# EAGLE board fesz_boundary_value_meter (EAGLE 6.5.0)

Size 160 x 100 mm. Coordinates in mm from the lower left corner, seen from the top.
Outline: 0,0 160,0 160,100 0,100 0,0
Copper layers (1*16): Top 0.035mm / dielectric 1.5mm / Bottom 0.035mm
Design rules "default": minimum track width 10mil, minimum drill 24mil, track to track 8mil, track to pad 8mil, pad to pad 8mil, via to via 8mil, smd to smd 8mil, copper to edge 40mil, drill to drill 8mil, minimum pad ring 10mil, minimum via ring 8mil, stop-mask expansion 4mil, vias tented up to drill 0mil, thermal gap 10mil

## Footprints (pad centres in the part's own frame; a part is rotated, then mirrored left to right if it is on the bottom)
E2,5-6 = drill 0.813 pad 1.6: + -1.27,0 | drill 0.813 pad 1.6 octagon: - 1.27,0
E2,5-6E = drill 0.813 pad 1.575: + -1.27,0 | drill 0.813 pad 1.575 octagon: - 1.27,0
MA04-1 = drill 1.016 long: 1 -3.81,0; 2 -1.27,0; 3 1.27,0; 4 3.81,0
DO41-10 = drill 1.118: A 5.08,0; C -5.08,0
MA08-1 = drill 1.016 long: 1 -8.89,0; 2 -6.35,0; 3 -3.81,0; 4 -1.27,0; 5 1.27,0; 6 3.81,0; 7 6.35,0; 8 8.89,0
DIL28-3 = drill 0.813 long: 1 -16.51,-3.81; 2 -13.97,-3.81; 3 -11.43,-3.81; 4 -8.89,-3.81; 5 -6.35,-3.81; 6 -3.81,-3.81; 7 -1.27,-3.81; 8 1.27,-3.81; 9 3.81,-3.81; 10 6.35,-3.81; 11 8.89,-3.81; 12 11.43,-3.81; 13 13.97,-3.81; 14 16.51,-3.81; 15 16.51,3.81; 16 13.97,3.81; 17 11.43,3.81; 18 8.89,3.81; 19 6.35,3.81; 20 3.81,3.81; 21 1.27,3.81; 22 -1.27,3.81; 23 -3.81,3.81; 24 -6.35,3.81; 25 -8.89,3.81; 26 -11.43,3.81; 27 -13.97,3.81; 28 -16.51,3.81
DUOLED-C-5MM = drill 0.813 long: AR 2.54,0; AX -2.54,0; C 0,0
LED3MM = drill 0.813 octagon: A -1.27,0; K 1.27,0
W237-102 = drill 1.194 long: 1 -2.5,-1.27; 2 2.5,-1.27
0207/10 = drill 0.813 octagon: 1 -5.08,0; 2 5.08,0
02PA = drill 0.914 long: 1 -1.27,0; 2 1.27,0
TO92 = drill 0.813 octagon: 1 1.27,0; 2 0,1.905; 3 -1.27,0
TO220V = drill 1.016 long: 1 -2.54,-2.54; 2 0,-2.54; 3 2.54,-2.54
S64W = drill 0.813 long: A 2.54,1.27; E -2.54,1.27; S 0,1.27

## Placement (x,y rotation side)
C1  100+uF  [E2,5-6]  -22.86,35.56 0 top  (outside the outline)
C2  10uF  [E2,5-6E]  -33.02,35.56 0 top  (outside the outline)
CATHODES  [MA04-1]  -43.18,34.29 0 top  (outside the outline)
D1  1N4004  [DO41-10]  -52.07,27.94 0 top  (outside the outline)
DIGITS  [MA08-1]  -34.29,27.94 0 top  (outside the outline)
IC1  [DIL28-3]  -36.83,6.35 0 top  (outside the outline)
LD1  [DUOLED-C-5MM]  26.67,29.21 0 top
LD2  [DUOLED-C-5MM]  21.59,34.29 0 top
LED2  Yellow  [LED3MM]  -58.42,57.15 0 top  (outside the outline)
POWER  [W237-102]  -17.78,19.05 0 top  (outside the outline)
R1  330  [0207/10]  -57.15,40.64 0 top  (outside the outline)
R2  330  [0207/10]  -19.05,45.72 0 top  (outside the outline)
R3  330  [0207/10]  -31.75,45.72 0 top  (outside the outline)
R4  330  [0207/10]  -44.45,45.72 0 top  (outside the outline)
R5  330  [0207/10]  -57.15,45.72 0 top  (outside the outline)
R6  330  [0207/10]  -19.05,50.8 0 top  (outside the outline)
R7  330  [0207/10]  -31.75,50.8 0 top  (outside the outline)
R8  330  [0207/10]  -44.45,50.8 0 top  (outside the outline)
R9  1000  [0207/10]  -57.15,50.8 0 top  (outside the outline)
R10  330  [0207/10]  -19.05,55.88 0 top  (outside the outline)
R11  330  [0207/10]  -31.75,55.88 0 top  (outside the outline)
R12  330  [0207/10]  -44.45,55.88 0 top  (outside the outline)
SL1  [02PA]  -15.24,2.54 0 top  (outside the outline)
T1  BC337  [TO92]  -59.69,34.29 0 top  (outside the outline)
T2  BC337  [TO92]  -22.86,40.64 0 top  (outside the outline)
T3  BC337  [TO92]  -35.56,40.64 0 top  (outside the outline)
T4  BC337  [TO92]  -48.26,40.64 0 top  (outside the outline)
V_REG  7805TV  [TO220V]  -46.99,21.59 0 top  (outside the outline)
VOLTAGE_DIVIDER  10K  [S64W]  -35.56,17.78 0 top  (outside the outline)

## Library data of the parts
C1 C2 R1-R12 = rcl
CATHODES DIGITS = con-lstb; OC_FARNELL: unknown; OC_NEWARK: unknown
D1 = diode
IC1 = ic-package
LD1 LD2 LED2 = led
POWER = con-wago-500; MPN: 237-102; OC_FARNELL: unknown; OC_NEWARK: 70K9898
SL1 = con-amp-quick; OC_FARNELL: unknown; OC_NEWARK: unknown
T1-T4 = transistor-neu-to92
V_REG = linear
VOLTAGE_DIVIDER = pot

## Nets
DIGIT_1_1: IC1.18 R1.1
DIGIT_2_: DIGITS.8 R1.2
DIGIT_2_1: IC1.17 R2.1
DIGIT_2_2: DIGITS.7 R2.2
DIGIT_3_1: IC1.16 R3.1
DIGIT_4_1: IC1.15 R4.1
DIGIT_5_1: IC1.14 R5.1
DIGIT_7_1: IC1.12 R7.1
DIGIT_8_1: IC1.11 R8.1
GND: C1.- C2.- IC1.8 IC1.22 LD1.C LD2.C LED2.K POWER.1 SL1.1 T1.1 T2.1 T3.1 T4.1 V_REG.2 VOLTAGE_DIVIDER.E
N$1: IC1.27 T1.2
N$2: IC1.26 T2.2
N$3: IC1.25 T3.2
N$4: IC1.24 T4.2
N$5: CATHODES.4 T1.3
N$6: CATHODES.3 T2.3
N$7: DIGITS.3 R6.2
N$8: CATHODES.2 T3.3
N$9: CATHODES.1 T4.3
N$10: DIGITS.6 R3.2
N$11: DIGITS.5 R4.2
N$12: DIGITS.4 R5.2
N$13: DIGITS.1 R8.2
N$14: LD1.AR LD2.AR R10.1
N$15: IC1.28 VOLTAGE_DIVIDER.S
N$16: IC1.13 R6.1
N$17: DIGITS.2 R7.2
N$18: IC1.2 R9.2
N$19: IC1.3 R10.2
N$20: R9.1 SL1.2
N$21: LD2.AX R12.1
N$22: IC1.4 R11.2
N$23: IC1.5 R12.2
N$24: LD1.AX R11.1
V_IN_MEASURE: D1.A POWER.2 VOLTAGE_DIVIDER.A
V_IN_SUPPLY: C1.+ D1.C V_REG.1
VCC: C2.+ IC1.7 IC1.20 V_REG.3

## Tracks (layer width: path | path; a pad name or v marks a point on that pad's centre or on a via)
DIGIT_1_1  (1 unrouted)
DIGIT_2_  (1 unrouted)
DIGIT_2_1  (1 unrouted)
DIGIT_2_2  (1 unrouted)
DIGIT_3_1  (1 unrouted)
DIGIT_4_1  (1 unrouted)
DIGIT_5_1  (1 unrouted)
DIGIT_7_1  (1 unrouted)
DIGIT_8_1  (1 unrouted)
GND  (14 unrouted)
N$1  (1 unrouted)
N$2  (1 unrouted)
N$3  (1 unrouted)
N$4  (1 unrouted)
N$5  (1 unrouted)
N$6  (1 unrouted)
N$7  (1 unrouted)
N$8  (1 unrouted)
N$9  (1 unrouted)
N$10  (1 unrouted)
N$11  (1 unrouted)
N$12  (1 unrouted)
N$13  (1 unrouted)
N$14  (2 unrouted)
N$15  (1 unrouted)
N$16  (1 unrouted)
N$17  (1 unrouted)
N$18  (1 unrouted)
N$19  (1 unrouted)
N$20  (1 unrouted)
N$21  (1 unrouted)
N$22  (1 unrouted)
N$23  (1 unrouted)
N$24  (1 unrouted)
V_IN_MEASURE  (2 unrouted)
V_IN_SUPPLY  (2 unrouted)
VCC  (3 unrouted)